# EAGLE board esp8266_breakouts (EAGLE 7.5.0)
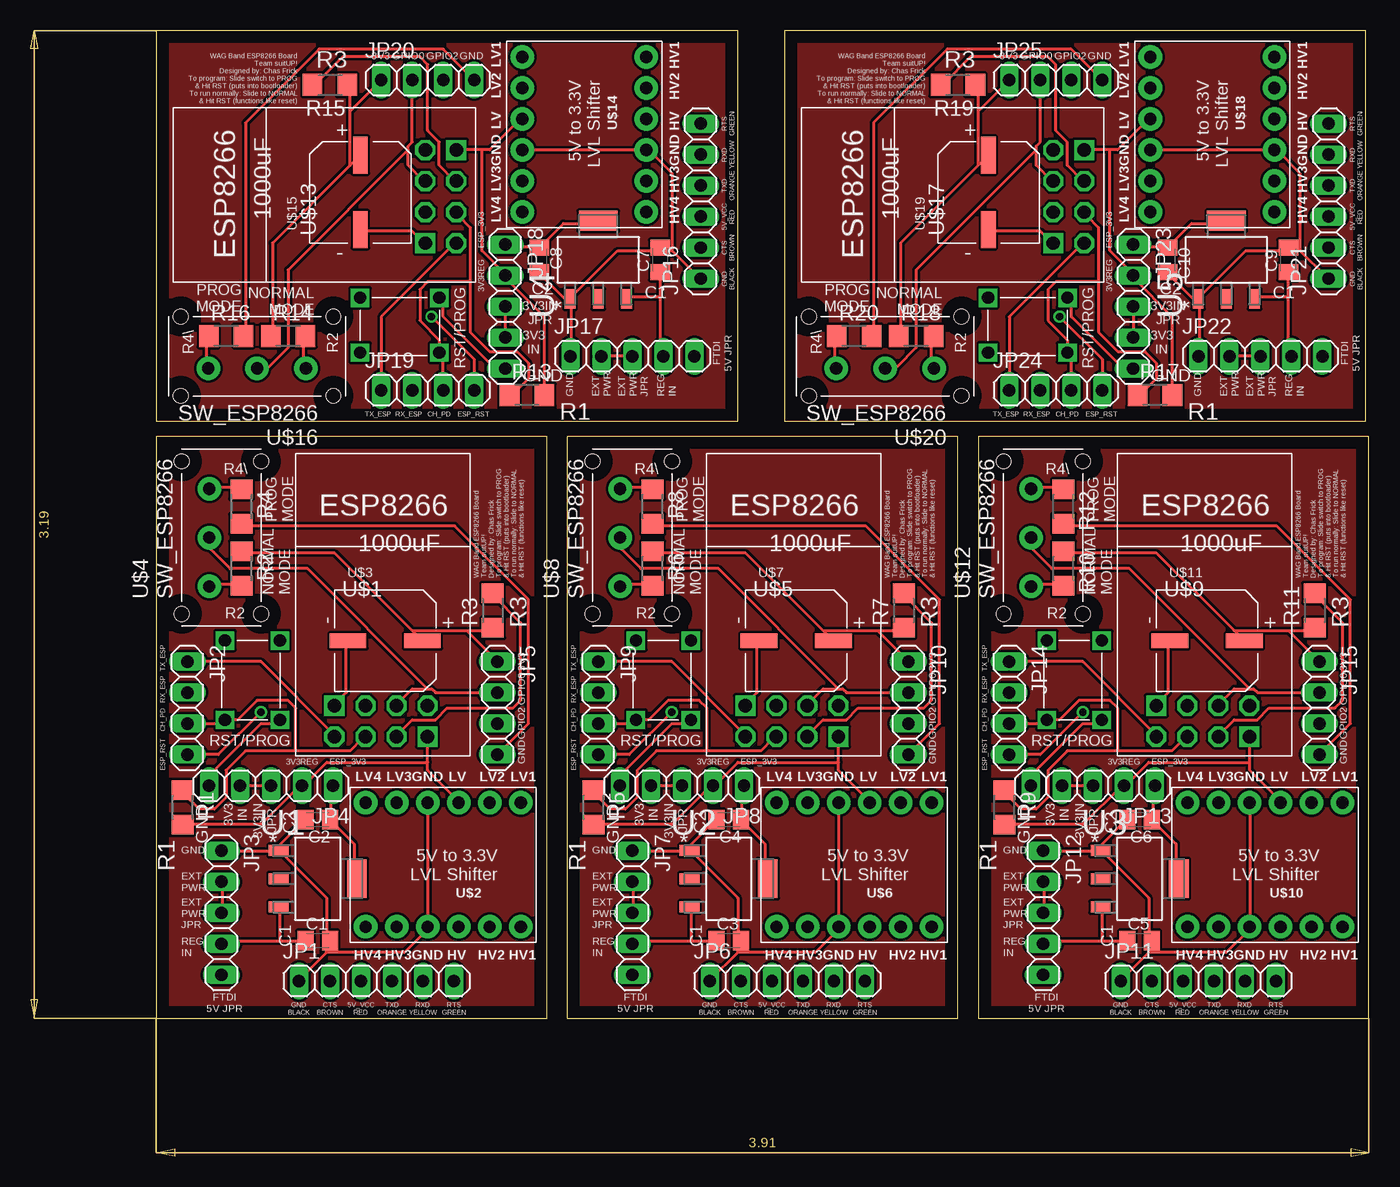
[diagram p0: board, top side]
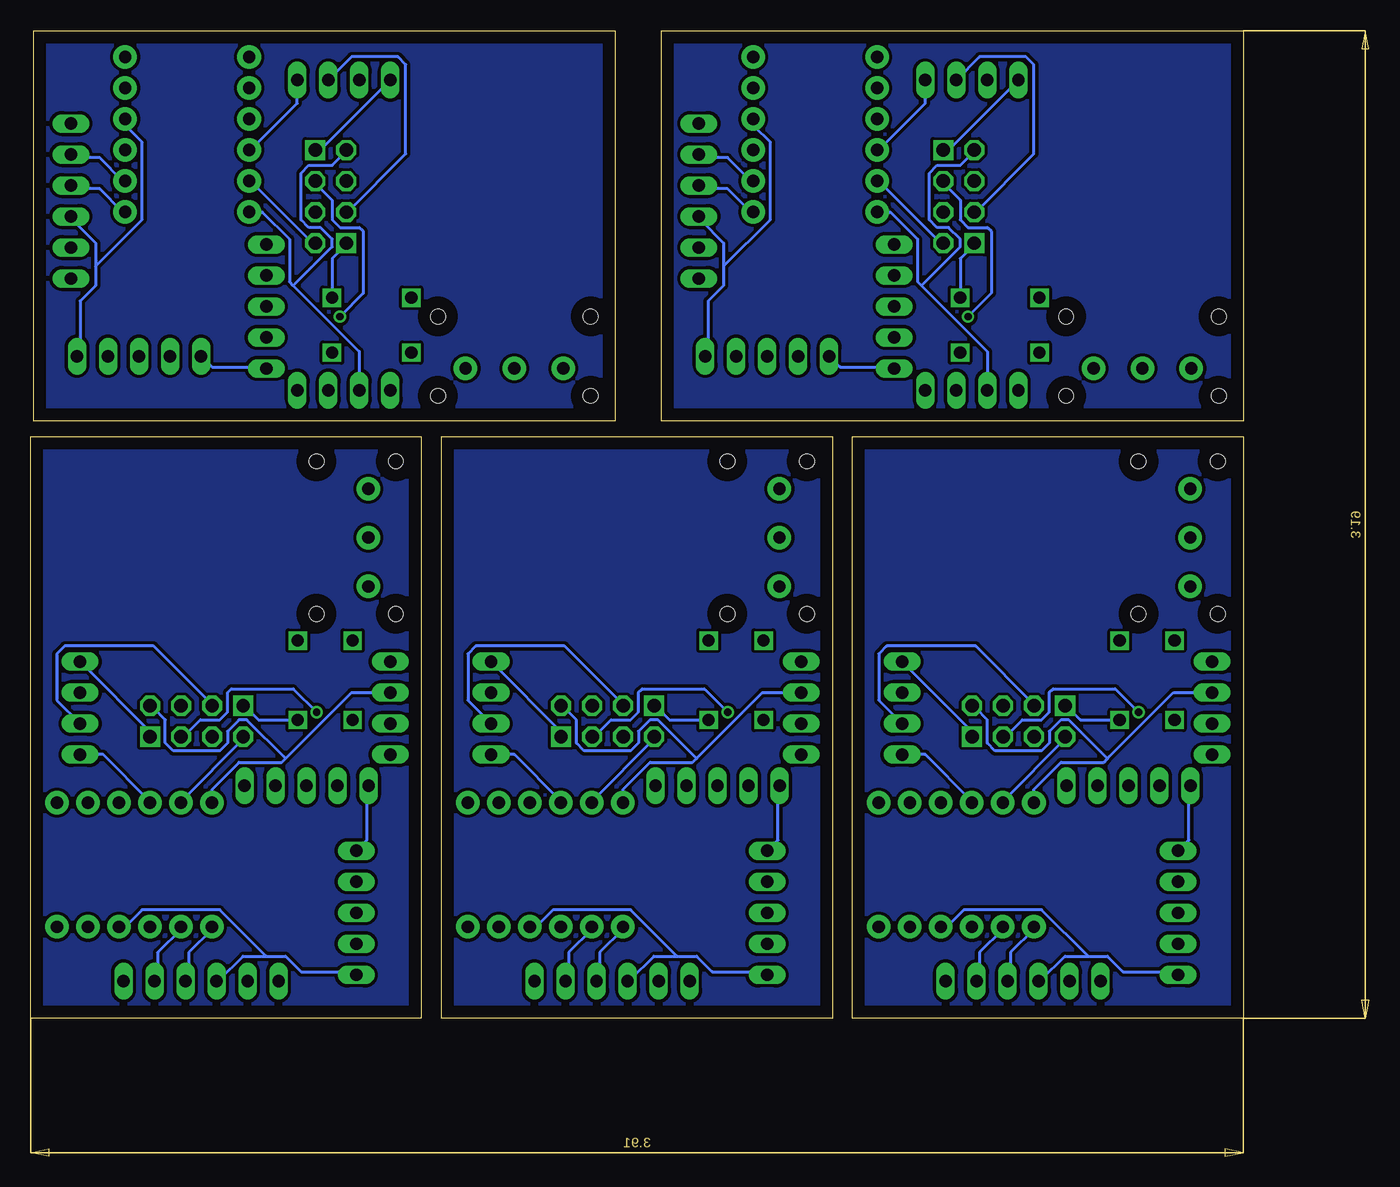
[diagram p1: board, bottom side, seen from below]

Size 99.31 x 80.9 mm. Coordinates in mm from the lower left corner, seen from the top.
Outline: 0,0 32,0 32,47.62 0,47.62 0,0
Outline: 33.66,0 65.66,0 65.66,47.62 33.66,47.62 33.66,0
Outline: 67.31,0 99.31,0 99.31,47.62 67.31,47.62 67.31,0
Outline: 47.62,48.9 47.62,80.9 0,80.9 0,48.9 47.62,48.9
Outline: 99.06,48.9 99.06,80.9 51.44,80.9 51.44,48.9 99.06,48.9
Copper layers (1*16): Top 0.035mm / dielectric 1.5mm / Bottom 0.035mm
Design rules "default": minimum track width 10mil, minimum drill 24mil, track to track 8mil, track to pad 8mil, pad to pad 8mil, via to via 8mil, smd to smd 8mil, copper to edge 40mil, drill to drill 8mil, minimum pad ring 10mil, minimum via ring 8mil, stop-mask expansion 4mil, vias tented up to drill 0mil, thermal gap 10mil

## Footprints (pad centres in the part's own frame; a part is rotated, then mirrored left to right if it is on the bottom)
C0805K = smd 1.3 x 1.6: 1 -1,0; 2 1,0
FTDI_5V_SPARKFUN = drill 1.016 long: CTS/BROWN -3.81,0; GND/BLACK -6.35,0; RTS/GREEN 6.35,0; RXD/YELLOW 3.81,0; TXD/ORANGE 1.27,0; VCC/RED -1.27,0
1X04 = drill 1.016 long: 1 -3.81,0; 2 -1.27,0; 3 1.27,0; 4 3.81,0
1X05 = drill 1.016 long: 1 -5.08,0; 2 -2.54,0; 3 0,0; 4 2.54,0; 5 5.08,0
R1206 = smd 1.6 x 1.803: 1 -1.422,0; 2 1.422,0
TACT = drill 1 square: P$1 -3.25,2.25; P$2 3.25,2.25; P$3 -3.25,-2.25; P$4 3.25,-2.25
SOT230P700X180-4N = smd 1.626 x 0.889: 1 -3.2,2.311; 2 -3.2,0; 3 -3.2,-2.311 | smd 1.626 x 3.175: 4 3.2,0
ESP01 = drill 1.1 octagon: CH_PD -1.285,-8.178; GPIO0 1.255,-5.638; GPIO2 -1.285,-5.638; RST 1.255,-8.178; RX 3.795,-5.638; TX -3.825,-8.178 | drill 1.1 square: GND -3.825,-5.638; VCC 3.795,-8.178
LVLSFT_PAC = drill 1 pad 1.93: P$1 -6.35,-5.08; P$2 -3.81,-5.08; P$3 -1.27,-5.08; P$4 1.27,-5.08; P$5 3.81,-5.08; P$6 6.35,-5.08; P$7 6.35,5.08; P$8 3.81,5.08; P$9 1.27,5.08; P$10 -1.27,5.08; P$11 -3.81,5.08; P$12 -6.35,5.08
TZV1000M = smd 1.2 x 3: + 0,3.05; - 0,-3.05
SW_PCB_ESP = drill 1 pad 1.93: P$1 4,1; P$2 0,1; P$3 -4,1 | hole 1.2: -6.25,3.25; -6.25,-3.25; 6.25,-3.25; 6.25,3.25

## Placement (x,y rotation side)
C1  [C0805K]  13.22,6.35 0 top
C2  [C0805K]  13.22,16.26 180 top
C3  [C0805K]  46.88,6.35 0 top
C4  [C0805K]  46.88,16.26 180 top
C5  [C0805K]  80.53,6.35 0 top
C6  [C0805K]  80.53,16.26 180 top
C7  [C0805K]  41.27,62.12 90 top
C8  [C0805K]  31.37,62.12 270 top
C9  [C0805K]  92.71,62.12 90 top
C10  [C0805K]  82.8,62.12 270 top
JP1  [FTDI_5V_SPARKFUN]  18.03,3.05 0 top
JP2  [1X04]  2.54,25.4 270 top
JP3  EXT_PWR_JMP  [1X05]  5.33,8.64 270 top
JP4  3V3_PWR_OUT  [1X05]  9.4,19.05 180 top
JP5  [1X04]  27.94,25.4 270 top
JP6  [FTDI_5V_SPARKFUN]  51.69,3.05 0 top
JP7  EXT_PWR_JMP  [1X05]  38.99,8.64 270 top
JP8  3V3_PWR_OUT  [1X05]  43.05,19.05 180 top
JP9  [1X04]  36.2,25.4 270 top
JP10  [1X04]  61.59,25.4 270 top
JP11  [FTDI_5V_SPARKFUN]  85.34,3.05 0 top
JP12  EXT_PWR_JMP  [1X05]  72.64,8.64 270 top
JP13  3V3_PWR_OUT  [1X05]  76.71,19.05 180 top
JP14  [1X04]  69.85,25.4 270 top
JP15  [1X04]  95.25,25.4 270 top
JP16  [FTDI_5V_SPARKFUN]  44.58,66.93 90 top
JP17  EXT_PWR_JMP  [1X05]  38.99,54.23 0 top
JP18  3V3_PWR_OUT  [1X05]  28.57,58.29 270 top
JP19  [1X04]  22.23,51.44 0 top
JP20  [1X04]  22.23,76.83 0 top
JP21  [FTDI_5V_SPARKFUN]  96.01,66.93 90 top
JP22  EXT_PWR_JMP  [1X05]  90.42,54.23 0 top
JP23  3V3_PWR_OUT  [1X05]  80.01,58.29 270 top
JP24  [1X04]  73.66,51.44 0 top
JP25  [1X04]  73.66,76.83 0 top
R1  10k  [R1206]  2.16,17.27 270 top
R2  10k  [R1206]  6.99,36.83 270 top
R3  10k  [R1206]  27.56,33.4 90 top
R4  10k  [R1206]  6.99,41.91 270 top
R5  10k  [R1206]  35.81,17.27 270 top
R6  10k  [R1206]  40.64,36.83 270 top
R7  10k  [R1206]  61.21,33.4 90 top
R8  10k  [R1206]  40.64,41.91 270 top
R9  10k  [R1206]  69.47,17.27 270 top
R10  10k  [R1206]  74.3,36.83 270 top
R11  10k  [R1206]  94.87,33.4 90 top
R12  10k  [R1206]  74.3,41.91 270 top
R13  10k  [R1206]  30.35,51.05 0 top
R14  10k  [R1206]  10.79,55.88 0 top
R15  10k  [R1206]  14.22,76.45 180 top
R16  10k  [R1206]  5.71,55.88 0 top
R17  10k  [R1206]  81.79,51.05 0 top
R18  10k  [R1206]  62.23,55.88 0 top
R19  10k  [R1206]  65.66,76.45 180 top
R20  10k  [R1206]  57.15,55.88 0 top
RST/PROG_MODE  TACT_SWITCH  [TACT]  7.87,27.69 270 top
RST/PROG_MODE1  TACT_SWITCH  [TACT]  41.53,27.69 270 top
RST/PROG_MODE2  TACT_SWITCH  [TACT]  75.18,27.69 270 top
RST/PROG_MODE3  TACT_SWITCH  [TACT]  19.94,56.77 0 top
RST/PROG_MODE4  TACT_SWITCH  [TACT]  71.37,56.77 0 top
U1  TLV1117-33CDCY  [SOT230P700X180-4N]  13.22,11.43 0 top
U2  TLV1117-33CDCY  [SOT230P700X180-4N]  46.88,11.43 0 top
U3  TLV1117-33CDCY  [SOT230P700X180-4N]  80.53,11.43 0 top
U4  TLV1117-33CDCY  [SOT230P700X180-4N]  36.2,62.12 90 top
U5  TLV1117-33CDCY  [SOT230P700X180-4N]  87.63,62.12 90 top
U$1  ESP01  [ESP01]  18.41,31.24 0 top
U$2  LVLSHIFTER  [LVLSFT_PAC]  23.5,12.57 180 top
U$3  TZVCAP  [TZV1000M]  18.75,30.91 270 top
U$4  SW_ESP8266  [SW_PCB_ESP]  5.33,39.37 90 top
U$5  ESP01  [ESP01]  52.07,31.24 0 top
U$6  LVLSHIFTER  [LVLSFT_PAC]  57.15,12.57 180 top
U$7  TZVCAP  [TZV1000M]  52.4,30.91 270 top
U$8  SW_ESP8266  [SW_PCB_ESP]  38.99,39.37 90 top
U$9  ESP01  [ESP01]  85.72,31.24 0 top
U$10  LVLSHIFTER  [LVLSFT_PAC]  90.81,12.57 180 top
U$11  TZVCAP  [TZV1000M]  86.06,30.91 270 top
U$12  SW_ESP8266  [SW_PCB_ESP]  72.64,39.37 90 top
U$13  ESP01  [ESP01]  16.38,67.31 90 top
U$14  LVLSHIFTER  [LVLSFT_PAC]  35.05,72.39 270 top
U$15  TZVCAP  [TZV1000M]  16.72,67.64 0 top
U$16  SW_ESP8266  [SW_PCB_ESP]  8.26,54.23 180 top
U$17  ESP01  [ESP01]  67.82,67.31 90 top
U$18  LVLSHIFTER  [LVLSFT_PAC]  86.49,72.39 270 top
U$19  TZVCAP  [TZV1000M]  68.15,67.64 0 top
U$20  SW_ESP8266  [SW_PCB_ESP]  59.69,54.23 180 top

## Library data of the parts
C1-C10 = rcl
JP1 JP6 JP11 JP16 JP21 RST/PROG_MODE RST/PROG_MODE1-RST/PROG_MODE4 U$1-U$20 = mqp_custom_parts
JP2-JP5 JP7-JP10 JP12-JP15 JP17-JP20 JP22-JP25 = pinhead
R1-R20 = resistor
U1-U5 = Texas Instruments_By_element14_Batch_1; MPN: TLV1117-33CDCY; OC_FARNELL: 1494942; OC_NEWARK: 67K8520; PACKAGE: SOT-223-3; SUPPLIER: TEXAS INSTRUMENTS

## Nets
3V3_EXT_IN: JP4.3 JP4.4
3V3_EXT_IN1: JP8.3 JP8.4
3V3_EXT_IN2: JP13.3 JP13.4
3V3_EXT_IN3: JP18.3 JP18.4
3V3_EXT_IN4: JP23.3 JP23.4
+3V1: JP8.2 JP10.1 R5.2 R6.1 R7.1 U$5.VCC U$6.P$3 U$7.+
+3V2: JP13.2 JP15.1 R9.2 R10.1 R11.1 U$9.VCC U$10.P$3 U$11.+
+3V3: JP4.2 JP5.1 R1.2 R2.1 R3.1 U$1.VCC U$2.P$3 U$3.+
+3V4: JP18.2 JP20.1 R13.2 R14.1 R15.1 U$13.VCC U$14.P$3 U$15.+
+3V5: JP23.2 JP25.1 R17.2 R18.1 R19.1 U$17.VCC U$18.P$3 U$19.+
CH_PD: JP2.3 R1.1 RST/PROG_MODE.P$4 U$1.CH_PD
CH_PD1: JP9.3 R5.1 RST/PROG_MODE1.P$4 U$5.CH_PD
CH_PD2: JP14.3 R9.1 RST/PROG_MODE2.P$4 U$9.CH_PD
CH_PD3: JP19.3 R13.1 RST/PROG_MODE3.P$4 U$13.CH_PD
CH_PD4: JP24.3 R17.1 RST/PROG_MODE4.P$4 U$17.CH_PD
CTS_IN: JP1.CTS/BROWN
CTS_IN1: JP6.CTS/BROWN
CTS_IN2: JP11.CTS/BROWN
CTS_IN3: JP16.CTS/BROWN
CTS_IN4: JP21.CTS/BROWN
ESP_RST: JP2.4 R3.2 U$1.RST
ESP_RST1: JP9.4 R7.2 U$5.RST
ESP_RST2: JP14.4 R11.2 U$9.RST
ESP_RST3: JP19.4 R15.2 U$13.RST
ESP_RST4: JP24.4 R19.2 U$17.RST
EXT_PWR_IN: JP3.2 JP3.3
EXT_PWR_IN1: JP7.2 JP7.3
EXT_PWR_IN2: JP12.2 JP12.3
EXT_PWR_IN3: JP17.2 JP17.3
EXT_PWR_IN4: JP22.2 JP22.3
GND: C1.2 C2.2 JP1.GND/BLACK JP3.1 JP4.5 JP5.4 R4.2 RST/PROG_MODE.P$2 U1.1 U$1.GND U$2.P$4 U$2.P$9 U$3.-
GND1: C3.2 C4.2 JP6.GND/BLACK JP7.1 JP8.5 JP10.4 R8.2 RST/PROG_MODE1.P$2 U2.1 U$5.GND U$6.P$4 U$6.P$9 U$7.-
GND2: C5.2 C6.2 JP11.GND/BLACK JP12.1 JP13.5 JP15.4 R12.2 RST/PROG_MODE2.P$2 U3.1 U$9.GND U$10.P$4 U$10.P$9 U$11.-
GND3: C7.2 C8.2 JP16.GND/BLACK JP17.1 JP18.5 JP20.4 R16.2 RST/PROG_MODE3.P$2 U4.1 U$13.GND U$14.P$4 U$14.P$9 U$15.-
GND4: C9.2 C10.2 JP21.GND/BLACK JP22.1 JP23.5 JP25.4 R20.2 RST/PROG_MODE4.P$2 U5.1 U$17.GND U$18.P$4 U$18.P$9 U$19.-
GPIO0: JP5.2 U$1.GPIO0 U$4.P$2
GPIO1: JP10.2 U$5.GPIO0 U$8.P$2
GPIO2: JP5.3 U$1.GPIO2
GPIO3: JP10.3 U$5.GPIO2
GPIO4: JP15.2 U$9.GPIO0 U$12.P$2
GPIO5: JP15.3 U$9.GPIO2
GPIO6: JP20.2 U$13.GPIO0 U$16.P$2
GPIO7: JP20.3 U$13.GPIO2
GPIO8: JP25.2 U$17.GPIO0 U$20.P$2
GPIO9: JP25.3 U$17.GPIO2
N$1: C2.1 JP4.1 U1.4
N$2: C1.1 JP3.4 U1.3
N$3: C3.1 JP7.4 U2.3
N$4: R2.2 U$4.P$3
N$5: C4.1 JP8.1 U2.4
N$6: R4.1 U$4.P$1
N$7: R6.2 U$8.P$3
N$8: R8.1 U$8.P$1
N$9: C5.1 JP12.4 U3.3
N$10: C6.1 JP13.1 U3.4
N$11: R10.2 U$12.P$3
N$12: R12.1 U$12.P$1
N$13: C7.1 JP17.4 U4.3
N$14: C8.1 JP18.1 U4.4
N$15: R14.2 U$16.P$3
N$16: R16.1 U$16.P$1
N$17: C9.1 JP22.4 U5.3
N$18: C10.1 JP23.1 U5.4
N$19: R18.2 U$20.P$3
N$20: R20.1 U$20.P$1
RTS_IN: JP1.RTS/GREEN
RTS_IN1: JP6.RTS/GREEN
RTS_IN2: JP11.RTS/GREEN
RTS_IN3: JP16.RTS/GREEN
RTS_IN4: JP21.RTS/GREEN
RXD_ESP: JP2.2 U$1.RX U$2.P$6
RXD_ESP1: JP9.2 U$5.RX U$6.P$6
RXD_ESP2: JP14.2 U$9.RX U$10.P$6
RXD_ESP3: JP19.2 U$13.RX U$14.P$6
RXD_ESP4: JP24.2 U$17.RX U$18.P$6
RXD_IN: JP1.RXD/YELLOW U$2.P$8
RXD_IN1: JP6.RXD/YELLOW U$6.P$8
RXD_IN2: JP11.RXD/YELLOW U$10.P$8
RXD_IN3: JP16.RXD/YELLOW U$14.P$8
RXD_IN4: JP21.RXD/YELLOW U$18.P$8
TXD_ESP: JP2.1 U$1.TX U$2.P$5
TXD_ESP1: JP9.1 U$5.TX U$6.P$5
TXD_ESP2: JP14.1 U$9.TX U$10.P$5
TXD_ESP3: JP19.1 U$13.TX U$14.P$5
TXD_ESP4: JP24.1 U$17.TX U$18.P$5
TXD_IN: JP1.TXD/ORANGE U$2.P$7
TXD_IN1: JP6.TXD/ORANGE U$6.P$7
TXD_IN2: JP11.TXD/ORANGE U$10.P$7
TXD_IN3: JP16.TXD/ORANGE U$14.P$7
TXD_IN4: JP21.TXD/ORANGE U$18.P$7
VCC_5V_FTDI: JP1.VCC/RED JP3.5 U$2.P$10
VCC_5V_FTDI1: JP6.VCC/RED JP7.5 U$6.P$10
VCC_5V_FTDI2: JP11.VCC/RED JP12.5 U$10.P$10
VCC_5V_FTDI3: JP16.VCC/RED JP17.5 U$14.P$10
VCC_5V_FTDI4: JP21.VCC/RED JP22.5 U$18.P$10

## Tracks (layer width: path | path; a pad name or v marks a point on that pad's centre or on a via)
3V3_EXT_IN
  Top 0.254: JP4.3 JP4.4
3V3_EXT_IN1
  Top 0.254: JP8.3 JP8.4
3V3_EXT_IN2
  Top 0.254: JP13.3 JP13.4
3V3_EXT_IN3
  Top 0.254: JP18.3 JP18.4
3V3_EXT_IN4
  Top 0.254: JP23.3 JP23.4
+3V1
  Top 0.254: 54.61,31.75 55.24,31.11 U$7.+ | 54.61,31.75 48.26,38.1 40.64,38.1 R6.1 | 54.61,31.75 59.05,31.75 | 59.05,31.75 60.96,31.75 R7.1 | 59.05,31.75 JP10.1 | 55.88,20.95 55.88,20.32 58.42,17.78 U$6.P$3 | 55.88,20.95 55.88,22.86 U$5.VCC | R5.2 35.88,15.88 42.23,15.88 45.4,19.05 JP8.2 45.72,19.05 47.62,20.95 55.88,20.95
  Bottom 0.254: JP10.1 55.56,23.18 U$5.VCC
+3V2
  Top 0.254: 88.27,31.75 88.9,31.11 U$11.+ | 88.27,31.75 81.92,38.1 74.3,38.1 R10.1 | 88.27,31.75 92.71,31.75 | 92.71,31.75 94.61,31.75 R11.1 | 92.71,31.75 JP15.1 | 89.53,20.95 89.53,20.32 92.08,17.78 U$10.P$3 | 89.53,20.95 89.53,22.86 U$9.VCC | R9.2 69.53,15.88 75.88,15.88 79.06,19.05 JP13.2 79.38,19.05 81.28,20.95 89.53,20.95
  Bottom 0.254: JP15.1 89.22,23.18 U$9.VCC
+3V3
  Top 0.254: 20.95,31.75 21.59,31.11 U$3.+ | 20.95,31.75 14.61,38.1 6.99,38.1 R2.1 | 20.95,31.75 25.4,31.75 | 25.4,31.75 27.3,31.75 R3.1 | 25.4,31.75 JP5.1 | 22.23,20.95 22.23,20.32 24.77,17.78 U$2.P$3 | 22.23,20.95 22.23,22.86 U$1.VCC | R1.2 2.22,15.88 8.57,15.88 11.75,19.05 JP4.2 12.06,19.05 13.97,20.95 22.23,20.95
  Bottom 0.254: JP5.1 21.91,23.18 U$1.VCC
+3V4
  Top 0.254: 15.88,69.85 16.51,70.48 U$15.+ | 15.88,69.85 9.53,63.5 9.53,55.88 R14.1 | 15.88,69.85 15.88,74.3 | 15.88,74.3 15.88,76.2 R15.1 | 15.88,74.3 JP20.1 | 26.67,71.12 27.3,71.12 29.84,73.66 U$14.P$3 | 26.67,71.12 24.77,71.12 U$13.VCC | R13.2 31.75,51.12 31.75,57.47 28.57,60.64 JP18.2 28.57,60.96 26.67,62.87 26.67,71.12
  Bottom 0.254: JP20.1 24.45,70.8 U$13.VCC
+3V5
  Top 0.254: 67.31,69.85 67.94,70.48 U$19.+ | 67.31,69.85 60.96,63.5 60.96,55.88 R18.1 | 67.31,69.85 67.31,74.3 | 67.31,74.3 67.31,76.2 R19.1 | 67.31,74.3 JP25.1 | 78.11,71.12 78.74,71.12 81.28,73.66 U$18.P$3 | 78.11,71.12 76.2,71.12 U$17.VCC | R17.2 83.19,51.12 83.19,57.47 80.01,60.64 JP23.2 80.01,60.96 78.11,62.87 78.11,71.12
  Bottom 0.254: JP25.1 75.88,70.8 U$17.VCC
CH_PD
  Top 0.254: JP2.3 5.4,24.13 RST/PROG_MODE.P$4 5.71,24.45 6.67,24.45 8.26,26.04 10.79,26.04 11.43,25.4 11.43,21.91 | 11.43,21.91 15.88,21.91 16.83,22.86 U$1.CH_PD | 11.43,21.91 7.3,21.91 5.71,20.32 5.71,18.1 4.76,17.14 3.49,17.14 2.22,18.41 R1.1
CH_PD1
  Top 0.254: JP9.3 39.05,24.13 RST/PROG_MODE1.P$4 39.37,24.45 40.32,24.45 41.91,26.04 44.45,26.04 45.09,25.4 45.09,21.91 | 45.09,21.91 49.53,21.91 50.48,22.86 U$5.CH_PD | 45.09,21.91 40.96,21.91 39.37,20.32 39.37,18.1 38.42,17.14 37.15,17.14 35.88,18.41 R5.1
CH_PD2
  Top 0.254: JP14.3 72.71,24.13 RST/PROG_MODE2.P$4 73.03,24.45 73.98,24.45 75.56,26.04 78.11,26.04 78.74,25.4 78.74,21.91 | 78.74,21.91 83.19,21.91 84.14,22.86 U$9.CH_PD | 78.74,21.91 74.61,21.91 73.03,20.32 73.03,18.1 72.07,17.14 70.8,17.14 69.53,18.41 R9.1
CH_PD3
  Top 0.254: JP19.3 23.5,54.29 RST/PROG_MODE3.P$4 23.18,54.61 23.18,55.56 21.59,57.15 21.59,59.69 22.23,60.33 25.72,60.33 | 25.72,60.33 25.72,64.77 24.77,65.72 U$13.CH_PD | 25.72,60.33 25.72,56.2 27.3,54.61 29.53,54.61 30.48,53.66 30.48,52.39 29.21,51.12 R13.1
CH_PD4
  Top 0.254: JP24.3 74.93,54.29 RST/PROG_MODE4.P$4 74.61,54.61 74.61,55.56 73.03,57.15 73.03,59.69 73.66,60.33 77.15,60.33 | 77.15,60.33 77.15,64.77 76.2,65.72 U$17.CH_PD | 77.15,60.33 77.15,56.2 78.74,54.61 80.96,54.61 81.92,53.66 81.92,52.39 80.64,51.12 R17.1
ESP_RST  (via drill 0.61)
  Top 0.254: R3.2 27.62,34.61 29.84,32.38 29.84,26.04 29.21,25.4 23.81,25.4 22.86,24.45 20.95,24.45 19.68,23.18 U$1.RST | JP2.4 5.08,21.59 v8.57,25.08
  Bottom 0.254: v8.57,25.08 10.48,26.99 15.56,26.99 15.88,26.67 15.88,25.08 16.51,24.45 18.1,24.45 19.37,23.18 U$1.RST
ESP_RST1  (via drill 0.61)
  Top 0.254: R7.2 61.28,34.61 63.5,32.38 63.5,26.04 62.87,25.4 57.47,25.4 56.52,24.45 54.61,24.45 53.34,23.18 U$5.RST | JP9.4 38.73,21.59 v42.23,25.08
  Bottom 0.254: v42.23,25.08 44.13,26.99 49.21,26.99 49.53,26.67 49.53,25.08 50.16,24.45 51.75,24.45 53.02,23.18 U$5.RST
ESP_RST2  (via drill 0.61)
  Top 0.254: R11.2 94.93,34.61 97.16,32.38 97.16,26.04 96.52,25.4 91.12,25.4 90.17,24.45 88.27,24.45 87,23.18 U$9.RST | JP14.4 72.39,21.59 v75.88,25.08
  Bottom 0.254: v75.88,25.08 77.79,26.99 82.87,26.99 83.19,26.67 83.19,25.08 83.82,24.45 85.41,24.45 86.68,23.18 U$9.RST
ESP_RST3  (via drill 0.61)
  Top 0.254: R15.2 13.02,76.52 15.24,78.74 21.59,78.74 22.23,78.11 22.23,72.71 23.18,71.75 23.18,69.85 24.45,68.58 U$13.RST | JP19.4 26.04,53.98 v22.54,57.47
  Bottom 0.254: v22.54,57.47 20.64,59.37 20.64,64.45 20.95,64.77 22.54,64.77 23.18,65.41 23.18,66.99 24.45,68.26 U$13.RST
ESP_RST4  (via drill 0.61)
  Top 0.254: R19.2 64.45,76.52 66.67,78.74 73.03,78.74 73.66,78.11 73.66,72.71 74.61,71.75 74.61,69.85 75.88,68.58 U$17.RST | JP24.4 77.47,53.98 v73.98,57.47
  Bottom 0.254: v73.98,57.47 72.07,59.37 72.07,64.45 72.39,64.77 73.98,64.77 74.61,65.41 74.61,66.99 75.88,68.26 U$17.RST
EXT_PWR_IN
  Top 0.254: JP3.3 5.4,8.89 5.4,11.11 JP3.2
EXT_PWR_IN1
  Top 0.254: JP7.3 39.05,8.89 39.05,11.11 JP7.2
EXT_PWR_IN2
  Top 0.254: JP12.3 72.71,8.89 72.71,11.11 JP12.2
EXT_PWR_IN3
  Top 0.254: JP17.3 38.73,54.29 36.51,54.29 JP17.2
EXT_PWR_IN4
  Top 0.254: JP22.3 90.17,54.29 87.95,54.29 JP22.2
GND
  Top 0.254: JP5.4 30.48,24.13 30.48,34.29 24.45,40.32 6.99,40.32 R4.2 | 13.97,5.4 13.97,6.35 | 13.97,5.4 11.75,3.17 JP1.GND/BLACK | U$2.P$4 U$2.P$9 22.23,7.3 20.32,5.4 13.97,5.4 | U$3.- 15.56,30.8 15.56,26.67 14.61,25.72 U$1.GND | C2.2 12.06,16.19 9.84,13.97 U1.1 | JP3.1 5.4,13.65 9.84,13.65 U1.1 | RST/PROG_MODE.P$2 9.84,24.13 8.57,24.13 4.45,20 4.45,19.05 JP4.5 | 13.97,6.35 13.97,9.84 10.16,13.65 U1.1 | 13.97,6.35 C1.2
  Bottom 0.254: RST/PROG_MODE.P$2 10.16,24.45 13.34,24.45 14.29,25.4 U$1.GND | JP3.1 4.45,14.61 4.45,19.05 JP4.5 | JP5.4 26.04,21.59 22.23,17.78 U$2.P$4
GND1
  Top 0.254: JP10.4 64.14,24.13 64.14,34.29 58.1,40.32 40.64,40.32 R8.2 | 47.62,5.4 47.62,6.35 | 47.62,5.4 45.4,3.17 JP6.GND/BLACK | U$6.P$4 U$6.P$9 55.88,7.3 53.98,5.4 47.62,5.4 | U$7.- 49.21,30.8 49.21,26.67 48.26,25.72 U$5.GND | C4.2 45.72,16.19 43.5,13.97 U2.1 | JP7.1 39.05,13.65 43.5,13.65 U2.1 | RST/PROG_MODE1.P$2 43.5,24.13 42.23,24.13 38.1,20 38.1,19.05 JP8.5 | 47.62,6.35 47.62,9.84 43.81,13.65 U2.1 | 47.62,6.35 C3.2
  Bottom 0.254: RST/PROG_MODE1.P$2 43.81,24.45 46.99,24.45 47.94,25.4 U$5.GND | JP7.1 38.1,14.61 38.1,19.05 JP8.5 | JP10.4 59.69,21.59 55.88,17.78 U$6.P$4
GND2
  Top 0.254: JP15.4 97.79,24.13 97.79,34.29 91.76,40.32 74.3,40.32 R12.2 | 81.28,5.4 81.28,6.35 | 81.28,5.4 79.06,3.17 JP11.GND/BLACK | U$10.P$4 U$10.P$9 89.53,7.3 87.63,5.4 81.28,5.4 | U$11.- 82.87,30.8 82.87,26.67 81.92,25.72 U$9.GND | C6.2 79.38,16.19 77.15,13.97 U3.1 | JP12.1 72.71,13.65 77.15,13.65 U3.1 | RST/PROG_MODE2.P$2 77.15,24.13 75.88,24.13 71.75,20 71.75,19.05 JP13.5 | 81.28,6.35 81.28,9.84 77.47,13.65 U3.1 | 81.28,6.35 C5.2
  Bottom 0.254: RST/PROG_MODE2.P$2 77.47,24.45 80.64,24.45 81.6,25.4 U$9.GND | JP12.1 71.75,14.61 71.75,19.05 JP13.5 | JP15.4 93.34,21.59 89.53,17.78 U$10.P$4
GND3
  Top 0.254: JP20.4 23.5,79.38 13.34,79.38 7.3,73.34 7.3,55.88 R16.2 | 42.23,62.87 41.27,62.87 | 42.23,62.87 44.45,60.64 JP16.GND/BLACK | U$14.P$4 U$14.P$9 40.32,71.12 42.23,69.22 42.23,62.87 | U$15.- 16.83,64.45 20.95,64.45 21.91,63.5 U$13.GND | C8.2 31.43,60.96 33.66,58.74 U4.1 | JP17.1 33.97,54.29 33.97,58.74 U4.1 | RST/PROG_MODE3.P$2 23.5,58.74 23.5,57.47 27.62,53.34 28.57,53.34 JP18.5 | 41.27,62.87 37.78,62.87 33.97,59.05 U4.1 | 41.27,62.87 C7.2
  Bottom 0.254: RST/PROG_MODE3.P$2 23.18,59.05 23.18,62.23 22.23,63.18 U$13.GND | JP17.1 33.02,53.34 28.57,53.34 JP18.5 | JP20.4 26.04,74.93 29.84,71.12 U$14.P$4
GND4
  Top 0.254: JP25.4 74.93,79.38 64.77,79.38 58.74,73.34 58.74,55.88 R20.2 | 93.66,62.87 92.71,62.87 | 93.66,62.87 95.89,60.64 JP21.GND/BLACK | U$18.P$4 U$18.P$9 91.76,71.12 93.66,69.22 93.66,62.87 | U$19.- 68.26,64.45 72.39,64.45 73.34,63.5 U$17.GND | C10.2 82.87,60.96 85.09,58.74 U5.1 | JP22.1 85.41,54.29 85.41,58.74 U5.1 | RST/PROG_MODE4.P$2 74.93,58.74 74.93,57.47 79.06,53.34 80.01,53.34 JP23.5 | 92.71,62.87 89.22,62.87 85.41,59.05 U5.1 | 92.71,62.87 C9.2
  Bottom 0.254: RST/PROG_MODE4.P$2 74.61,59.05 74.61,62.23 73.66,63.18 U$17.GND | JP22.1 84.45,53.34 80.01,53.34 JP23.5 | JP25.4 77.47,74.93 81.28,71.12 U$18.P$4
GPIO0
  Top 0.254: JP5.2 22.86,26.67 22.54,26.99 22.23,26.99 | 22.23,26.99 20.95,26.99 19.68,25.72 U$1.GPIO0 | 22.23,26.99 12.38,36.83 6.03,36.83 4.45,38.42 4.45,39.37 U$4.P$2
GPIO1
  Top 0.254: JP10.2 56.52,26.67 56.2,26.99 55.88,26.99 | 55.88,26.99 54.61,26.99 53.34,25.72 U$5.GPIO0 | 55.88,26.99 46.04,36.83 39.69,36.83 38.1,38.42 38.1,39.37 U$8.P$2
GPIO2
  Bottom 0.254: JP5.3 29.84,26.04 29.84,29.84 29.21,30.48 21.91,30.48 17.14,25.72 U$1.GPIO2
GPIO3
  Bottom 0.254: JP10.3 63.5,26.04 63.5,29.84 62.87,30.48 55.56,30.48 50.8,25.72 U$5.GPIO2
GPIO4
  Top 0.254: JP15.2 90.17,26.67 89.85,26.99 89.53,26.99 | 89.53,26.99 88.27,26.99 87,25.72 U$9.GPIO0 | 89.53,26.99 79.69,36.83 73.34,36.83 71.75,38.42 71.75,39.37 U$12.P$2
GPIO5
  Bottom 0.254: JP15.3 97.16,26.04 97.16,29.84 96.52,30.48 89.22,30.48 84.45,25.72 U$9.GPIO2
GPIO6
  Top 0.254: JP20.2 20.95,71.75 20.64,71.44 20.64,71.12 | 20.64,71.12 20.64,69.85 21.91,68.58 U$13.GPIO0 | 20.64,71.12 10.79,61.28 10.79,54.93 9.21,53.34 8.26,53.34 U$16.P$2
GPIO7
  Bottom 0.254: JP20.3 21.59,78.74 17.78,78.74 17.14,78.11 17.14,70.8 21.91,66.04 U$13.GPIO2
GPIO8
  Top 0.254: JP25.2 72.39,71.75 72.07,71.44 72.07,71.12 | 72.07,71.12 72.07,69.85 73.34,68.58 U$17.GPIO0 | 72.07,71.12 62.23,61.28 62.23,54.93 60.64,53.34 59.69,53.34 U$20.P$2
GPIO9
  Bottom 0.254: JP25.3 73.03,78.74 69.22,78.74 68.58,78.11 68.58,70.8 73.34,66.04 U$17.GPIO2
N$1
  Top 0.254: JP4.1 14.29,19.05 14.29,16.51 C2.1 16.19,14.29 16.19,11.43 U1.4
N$2
  Top 0.254: 10.16,6.35 5.4,6.35 JP3.4 | 10.16,6.35 C1.1 | 10.16,6.35 10.16,8.89 U1.3
N$3
  Top 0.254: 43.81,6.35 39.05,6.35 JP7.4 | 43.81,6.35 C3.1 | 43.81,6.35 43.81,8.89 U2.3
N$4
  Top 0.254: R2.2 6.99,35.56 4.45,35.56 U$4.P$3
N$5
  Top 0.254: JP8.1 47.94,19.05 47.94,16.51 C4.1 49.85,14.29 49.85,11.43 U2.4
N$6
  Top 0.254: R4.1 6.99,43.5 4.45,43.5 U$4.P$1
N$7
  Top 0.254: R6.2 40.64,35.56 38.1,35.56 U$8.P$3
N$8
  Top 0.254: R8.1 40.64,43.5 38.1,43.5 U$8.P$1
N$9
  Top 0.254: 77.47,6.35 72.71,6.35 JP12.4 | 77.47,6.35 C5.1 | 77.47,6.35 77.47,8.89 U3.3
N$10
  Top 0.254: JP13.1 81.6,19.05 81.6,16.51 C6.1 83.5,14.29 83.5,11.43 U3.4
N$11
  Top 0.254: R10.2 74.3,35.56 71.75,35.56 U$12.P$3
N$12
  Top 0.254: R12.1 74.3,43.5 71.75,43.5 U$12.P$1
N$13
  Top 0.254: 41.27,59.05 41.27,54.29 JP17.4 | 41.27,59.05 C7.1 | 41.27,59.05 38.73,59.05 U4.3
N$14
  Top 0.254: JP18.1 28.57,63.18 31.11,63.18 C8.1 33.34,65.09 36.2,65.09 U4.4
N$15
  Top 0.254: R14.2 12.06,55.88 12.06,53.34 U$16.P$3
N$16
  Top 0.254: R16.1 4.13,55.88 4.13,53.34 U$16.P$1
N$17
  Top 0.254: 92.71,59.05 92.71,54.29 JP22.4 | 92.71,59.05 C9.1 | 92.71,59.05 90.17,59.05 U5.3
N$18
  Top 0.254: JP23.1 80.01,63.18 82.55,63.18 C10.1 84.77,65.09 87.63,65.09 U5.4
N$19
  Top 0.254: R18.2 63.5,55.88 63.5,53.34 U$20.P$3
N$20
  Top 0.254: R20.1 55.56,55.88 55.56,53.34 U$20.P$1
RXD_ESP
  Bottom 0.254: JP2.2 5.71,26.67 11.11,21.27 | 11.11,21.27 11.43,20.95 14.92,20.95 17.14,18.73 U$2.P$6 | 11.11,21.27 14.29,24.45 14.92,24.45 15.88,23.5 15.88,22.54 16.51,21.91 20.32,21.91 20.95,22.54 20.95,24.45 21.91,25.4 U$1.RX
RXD_ESP1
  Bottom 0.254: JP9.2 39.37,26.67 44.77,21.27 | 44.77,21.27 45.09,20.95 48.58,20.95 50.8,18.73 U$6.P$6 | 44.77,21.27 47.94,24.45 48.58,24.45 49.53,23.5 49.53,22.54 50.16,21.91 53.98,21.91 54.61,22.54 54.61,24.45 55.56,25.4 U$5.RX
RXD_ESP2
  Bottom 0.254: JP14.2 73.03,26.67 78.42,21.27 | 78.42,21.27 78.74,20.95 82.23,20.95 84.45,18.73 U$10.P$6 | 78.42,21.27 81.6,24.45 82.23,24.45 83.19,23.5 83.19,22.54 83.82,21.91 87.63,21.91 88.27,22.54 88.27,24.45 89.22,25.4 U$9.RX
RXD_ESP3
  Bottom 0.254: JP19.2 20.95,54.61 26.35,60.01 | 26.35,60.01 26.67,60.33 26.67,63.82 28.89,66.04 U$14.P$6 | 26.35,60.01 23.18,63.18 23.18,63.82 24.13,64.77 25.08,64.77 25.72,65.41 25.72,69.22 25.08,69.85 23.18,69.85 22.23,70.8 U$13.RX
RXD_ESP4
  Bottom 0.254: JP24.2 72.39,54.61 77.79,60.01 | 77.79,60.01 78.11,60.33 78.11,63.82 80.33,66.04 U$18.P$6 | 77.79,60.01 74.61,63.18 74.61,63.82 75.56,64.77 76.52,64.77 77.15,65.41 77.15,69.22 76.52,69.85 74.61,69.85 73.66,70.8 U$17.RX
RXD_IN
  Bottom 0.254: JP1.RXD/YELLOW 21.59,3.17 21.59,5.4 19.68,7.3 U$2.P$8
RXD_IN1
  Bottom 0.254: JP6.RXD/YELLOW 55.24,3.17 55.24,5.4 53.34,7.3 U$6.P$8
RXD_IN2
  Bottom 0.254: JP11.RXD/YELLOW 88.9,3.17 88.9,5.4 87,7.3 U$10.P$8
RXD_IN3
  Bottom 0.254: JP16.RXD/YELLOW 44.45,70.48 42.23,70.48 40.32,68.58 U$14.P$8
RXD_IN4
  Bottom 0.254: JP21.RXD/YELLOW 95.89,70.48 93.66,70.48 91.76,68.58 U$18.P$8
S$1
  pour Bottom (isolate 0.254): 0,0 0,47.62 32,47.62 32,0
S$2
  pour Top: 0,0 0,47.62 32,47.62 32,0
S$3
  pour Bottom (isolate 0.254): 33.66,0 33.66,47.62 65.66,47.62 65.66,0
S$4
  pour Top: 33.66,0 33.66,47.62 65.66,47.62 65.66,0
S$5
  pour Bottom (isolate 0.254): 67.31,0 67.31,47.62 99.31,47.62 99.31,0
S$6
  pour Top: 67.31,0 67.31,47.62 99.31,47.62 99.31,0
S$7
  pour Bottom (isolate 0.254): 47.62,48.9 0,48.9 0,80.9 47.62,80.9
S$8
  pour Top: 47.62,48.9 0,48.9 0,80.9 47.62,80.9
S$9
  pour Bottom (isolate 0.254): 99.06,48.9 51.44,48.9 51.44,80.9 99.06,80.9
S$10
  pour Top: 99.06,48.9 51.44,48.9 51.44,80.9 99.06,80.9
TXD_ESP
  Top 0.254: JP2.1 8.57,29.21 14.61,23.18 U$1.TX
  Bottom 0.254: U$2.P$5 19.68,17.78 14.61,22.86 U$1.TX
TXD_ESP1
  Top 0.254: JP9.1 42.23,29.21 48.26,23.18 U$5.TX
  Bottom 0.254: U$6.P$5 53.34,17.78 48.26,22.86 U$5.TX
TXD_ESP2
  Top 0.254: JP14.1 75.88,29.21 81.92,23.18 U$9.TX
  Bottom 0.254: U$10.P$5 87,17.78 81.92,22.86 U$9.TX
TXD_ESP3
  Top 0.254: JP19.1 18.41,57.47 24.45,63.5 U$13.TX
  Bottom 0.254: U$14.P$5 29.84,68.58 24.77,63.5 U$13.TX
TXD_ESP4
  Top 0.254: JP24.1 69.85,57.47 75.88,63.5 U$17.TX
  Bottom 0.254: U$18.P$5 81.28,68.58 76.2,63.5 U$17.TX
TXD_IN
  Bottom 0.254: JP1.TXD/ORANGE 19.05,3.17 19.05,5.4 17.14,7.3 U$2.P$7
TXD_IN1
  Bottom 0.254: JP6.TXD/ORANGE 52.7,3.17 52.7,5.4 50.8,7.3 U$6.P$7
TXD_IN2
  Bottom 0.254: JP11.TXD/ORANGE 86.36,3.17 86.36,5.4 84.45,7.3 U$10.P$7
TXD_IN3
  Bottom 0.254: JP16.TXD/ORANGE 44.45,67.94 42.23,67.94 40.32,66.04 U$14.P$7
TXD_IN4
  Bottom 0.254: JP21.TXD/ORANGE 95.89,67.94 93.66,67.94 91.76,66.04 U$18.P$7
VCC_5V_FTDI
  Bottom 0.254: 12.7,5.08 14.61,5.08 16.51,3.17 JP1.VCC/RED | 12.7,5.08 11.11,5.08 9.84,3.81 5.4,3.81 JP3.5 | 12.7,5.08 16.51,8.89 22.86,8.89 24.13,7.62 24.77,7.62 U$2.P$10
VCC_5V_FTDI1
  Bottom 0.254: 46.35,5.08 48.26,5.08 50.16,3.17 JP6.VCC/RED | 46.35,5.08 44.77,5.08 43.5,3.81 39.05,3.81 JP7.5 | 46.35,5.08 50.16,8.89 56.52,8.89 57.78,7.62 58.42,7.62 U$6.P$10
VCC_5V_FTDI2
  Bottom 0.254: 80.01,5.08 81.92,5.08 83.82,3.17 JP11.VCC/RED | 80.01,5.08 78.42,5.08 77.15,3.81 72.71,3.81 JP12.5 | 80.01,5.08 83.82,8.89 90.17,8.89 91.44,7.62 92.08,7.62 U$10.P$10
VCC_5V_FTDI3
  Bottom 0.254: 42.55,61.59 42.55,63.5 44.45,65.41 JP16.VCC/RED | 42.55,61.59 42.55,60.01 43.81,58.74 43.81,54.29 JP17.5 | 42.55,61.59 38.73,65.41 38.73,71.75 40.01,73.03 40.01,73.66 U$14.P$10
VCC_5V_FTDI4
  Bottom 0.254: 93.98,61.59 93.98,63.5 95.89,65.41 JP21.VCC/RED | 93.98,61.59 93.98,60.01 95.25,58.74 95.25,54.29 JP22.5 | 93.98,61.59 90.17,65.41 90.17,71.75 91.44,73.03 91.44,73.66 U$18.P$10

## Text on the board
tPlace: R3 | 3V3 | GPIO0 | GPIO2 | GND | R3 | 3V3 | GPIO0 | GPIO2 | GND | WAG Band ESP8266 Board / Team suitUP! / Designed by: Chas Frick / To program: Slide switch to PROG / & Hit RST (puts into bootloader) / To run normally: Slide to NORMAL / & Hit RST (functions like reset) | WAG Band ESP8266 Board / Team suitUP! / Designed by: Chas Frick / To program: Slide switch to PROG / & Hit RST (puts into bootloader) / To run normally: Slide to NORMAL / & Hit RST (functions like reset) | RTS / GREEN | RTS / GREEN | RXD / YELLOW | RXD / YELLOW | TXD / ORANGE | TXD / ORANGE | ESP_3V3 | 5V_VCC / RED | ESP_3V3 | 5V_VCC / RED | 1000uF | 1000uF | CTS / BROWN | CTS / BROWN | GND / BLACK | GND / BLACK | PROG / MODE | NORMAL / MODE | RST/PROG | C2 | C1 | PROG / MODE | NORMAL / MODE | RST/PROG | C2 | C1 | 3V3REG | 3V3REG | 3V3IN / JPR | 3V3IN / JPR | R4\ | R2 | R4\ | R2 | 3V3 / IN | 3V3 / IN | FTDI / 5V JPR | FTDI / 5V JPR | GND | GND | GND | EXT / PWR | EXT / PWR / JPR | REG / IN | GND | EXT / PWR | EXT / PWR / JPR | REG / IN | TX_ESP | RX_ESP | CH_PD | ESP_RST | R1 | TX_ESP | RX_ESP | CH_PD | ESP_RST | R1 | R4\ | R4\ | R4\ | PROG / MODE | PROG / MODE | PROG / MODE | 1000uF | 1000uF | 1000uF | WAG Band ESP8266 Board / Team suitUP! / Designed by: Chas Frick / To program: Slide switch to PROG / & Hit RST (puts into bootloader) / To run normally: Slide to NORMAL / & Hit RST (functions like reset) | WAG Band ESP8266 Board / Team suitUP! / Designed by: Chas Frick / To program: Slide switch to PROG / & Hit RST (puts into bootloader) / To run normally: Slide to NORMAL / & Hit RST (functions like reset) | WAG Band ESP8266 Board / Team suitUP! / Designed by: Chas Frick / To program: Slide switch to PROG / & Hit RST (puts into bootloader) / To run normally: Slide to NORMAL / & Hit RST (functions like reset) | NORMAL / MODE | NORMAL / MODE | NORMAL / MODE | R2 | R2 | R2 | R3 | R3 | R3 | TX_ESP | 3V3 | TX_ESP | 3V3 | TX_ESP | 3V3 | RX_ESP | GPIO0 | RX_ESP | GPIO0 | RX_ESP | GPIO0 | CH_PD | RST/PROG | GPIO2 | CH_PD | RST/PROG | GPIO2 | CH_PD | RST/PROG | GPIO2 | 3V3REG | ESP_3V3 | GND | 3V3REG | ESP_3V3 | GND | 3V3REG | ESP_3V3 | GND | ESP_RST | ESP_RST | ESP_RST | GND | GND | GND | 3V3 / IN | 3V3 / IN | 3V3 / IN | 3V3IN / JPR | 3V3IN / JPR | 3V3IN / JPR | C2 | C2 | C2 | GND | GND | GND | R1 | R1 | R1 | EXT / PWR | EXT / PWR | EXT / PWR | EXT / PWR / JPR | EXT / PWR / JPR | EXT / PWR / JPR | C1 | C1 | C1 | REG / IN | REG / IN | REG / IN | FTDI / 5V JPR | GND / BLACK | CTS / BROWN | 5V_VCC / RED | TXD / ORANGE | RXD / YELLOW | RTS / GREEN | FTDI / 5V JPR | GND / BLACK | CTS / BROWN | 5V_VCC / RED | TXD / ORANGE | RXD / YELLOW | RTS / GREEN | FTDI / 5V JPR | GND / BLACK | CTS / BROWN | 5V_VCC / RED | TXD / ORANGE | RXD / YELLOW | RTS / GREEN